# Altium PCB M8P.PcbDoc
Units mm, origin at the board's own origin, x right, y up, seen from the top; angles counter-clockwise.
Board outline 34.8 x 32 mm, 2 copper layers (Top Layer, Bottom Layer); 30 components, 25 nets, 123 pads, 15 vias.
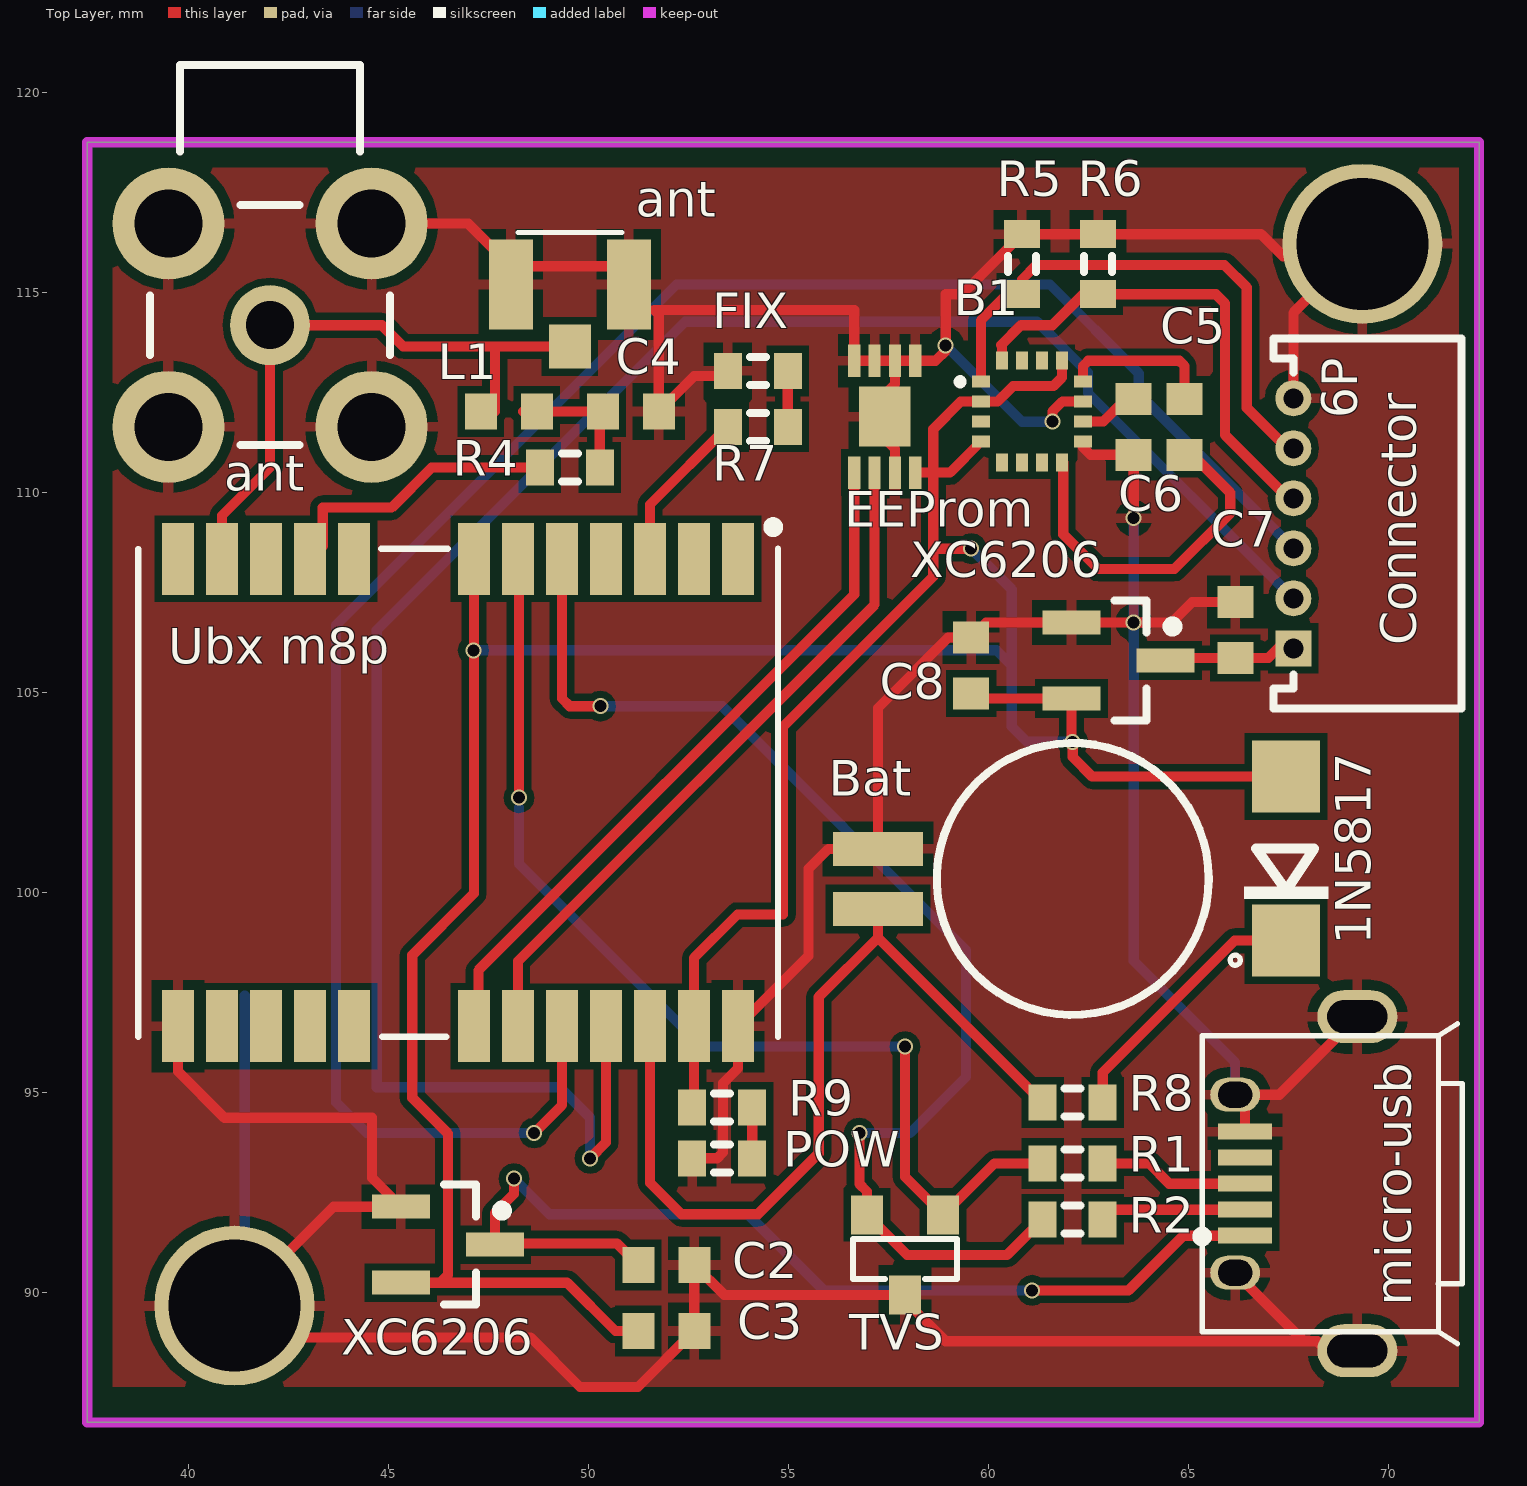
[diagram p0: Top Layer view]
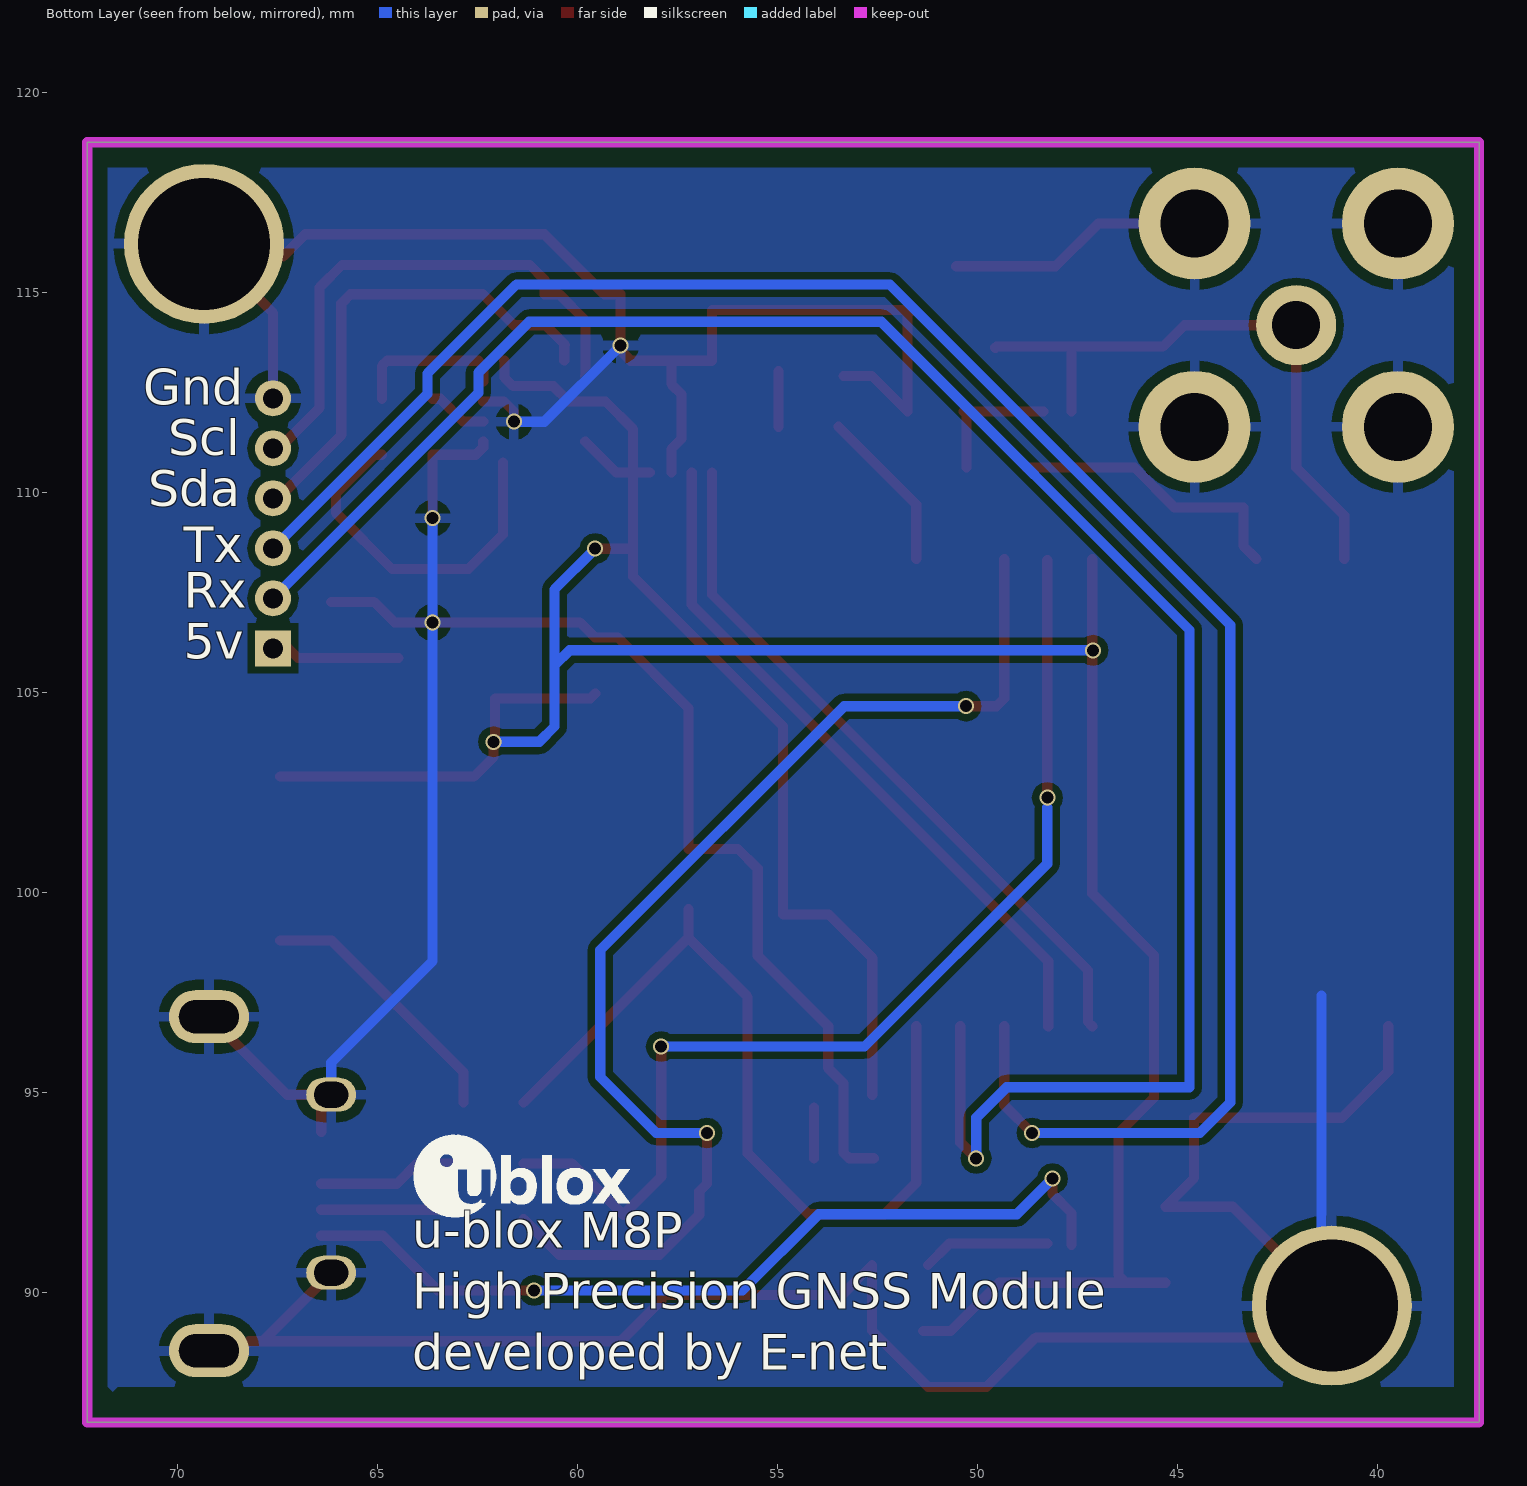
[diagram p1: Bottom Layer view, seen from below]

## Layer stack, top to bottom
Top Solder: solder mask 0.0102, Solder Resist, Dk 3.5
Top Layer: signal copper 0.0356
Dielectric 1: dielectric 0.32, FR-4, Dk 4.8
Bottom Layer: signal copper 0.0356
Bottom Solder: solder mask 0.0102, Solder Resist, Dk 3.5

## Board outline
37.465,86.741 37.465,118.745 72.263,118.745 72.263,86.741

## Design rules (kind name [scope] priority, off if disabled: settings)
Clearance [All] p1: gap=0.178
PolygonConnect [All] p1: connectstyle=Relief reliefconductorwidth=0.254 reliefentries=4 polygonreliefangle="90 Angle" airgapwidth=0.254
RoutingVias [All] p1: holewidth=0.711 width=1.27 viastyle="Through Hole" minholewidth=0.711 minwidth=1.27 maxholewidth=0.711 maxwidth=1.27
SolderMaskExpansion [All] p1: expansion=0.102
Width [All] p1: maxlimit=0.254 minlimit=0.254 preferedwidth=0.254
30 further rules are at their usual default settings.

## Components (designator, comment, footprint, x,y, rotation, side; value= is the part's Value field where it differs from the comment)
1N5817 "1N5817" DO214AC_SS12(Primary) 67.437,100.838 r90 top (schematic designator Diode)
ant "COAX-F" MCX5.08-H5 42.037,114.173 r270 top
ant "U.FL-R-SMT(01)" HRS_U.FL-R-SMT(01) 49.53,115.189 r0 top (schematic designator ant2)
B1 "HMC5883L-TR" 16-PIN-LPCC 61.087,112.014 r0 top
Bat "coin cell" BATTCON-6.8MM 62.103,100.33 r180 top (schematic designator BT?)
C2 "Cap Semi" 1608[0603] 51.943,90.678 r0 top
C3 "Cap Semi" 1608[0603] 51.943,89.027 r0 top
C4 "Cap Semi" 1608[0603] 51.054,112.014 r0 top
C5 "Cap Semi" 1608[0603] 64.897,111.633 r270 top
C6 "Cap Pol2" 1608[0603] 63.627,111.633 r270 top
C7 "Cap Semi" 1608[0603] 66.167,106.553 r90 top
C8 "Cap Semi" 1608[0603] 59.563,105.664 r90 top
Connector "653006117322" 653006117322 69.469,109.22 r90 top (schematic designator Connector1)
EEProm "24AA32AT-I/MC" DFN200X300X100-9N 57.404,111.887 r270 top (schematic designator EEPROM)
FIX "LED2" J1-0603 54.229,113.03 r180 top
L1 "Inductor" 1608[0603] 48.006,112.014 r0 top
micro-usb "WR-Communication Connectors 629105150921" 629105150921 67.691,92.71 r90 top
POW "LED2" J1-0603 53.34,93.345 r180 top
R1 "RES" J1-0603 62.103,93.218 r180 top
R2 "27R" J1-0603 62.103,91.821 r180 top
R4 "Res3" J1-0603 49.53,110.617 r180 top
R5 "Res3" J1-0603 60.833,115.697 r270 top
R6 "Res3" J1-0603 62.738,115.697 r90 top
R7 "Res3" J1-0603 54.229,111.633 r0 top
R8 "Res3" J1-0603 62.103,94.742 r0 top
R9 "Res3" J1-0603 53.34,94.615 r0 top
TVS "CDSOT23-SM712" SOT-23-3 57.912,90.932 r180 top (schematic designator "TVS DIODE")
"Ubx m8p" "NEO-M8" NEO 46.736,102.489 r90 top
XC6206 "AMS1117-3.3" SOT23_M 63.246,105.791 r0 top (schematic designator "XC6206  3.3")
XC6206 "AMS1117-3.3" SOT23_M 46.482,91.186 r0 top (schematic designator "XC6206  3.3-USB")

## Footprints (in the part's own frame and the unit in brackets; to place one, negate y for a bottom-side part, rotate by r counter-clockwise, add the part's x,y. Pads: shape width x height; smd on the part's side, far side on the other; paste and mask are expansions set on the pad)
16-PIN-LPCC [mm]
  rect 0.45x0.3 smd: 1(-1.275,0.75) 2(-1.275,0.25) 3(-1.275,-0.25) 4(-1.275,-0.75) 9(1.275,-0.75) 10(1.275,-0.25) 11(1.275,0.25) 12(1.275,0.75)
  rect 0.3x0.45 smd: 5(-0.75,-1.275) 6(-0.25,-1.275) 7(0.25,-1.275) 8(0.75,-1.275) 13(0.75,1.275) 14(0.25,1.275) 15(-0.25,1.275) 16(-0.75,1.275)
  silkscreen extent -1.83,0.71 -1.76,0.78
1608[0603] [mm] "Chip Capacitor, Body 1.6x0.8mm, IPC High Density"
  rect 0.8x0.9 smd: 1(-0.7,0) 2(0.7,0)
  body extent -0.87,-0.48 0.87,0.48, height 1.3
629105150921 [mm] "WR-COM_USB_Micro Type AB_Horizontal_SMT Micro Type AB Horizontal SMT - with Pegs - T&R Packaging"
  rect 0.4x1.35 smd: 1(-1.3,1.278) 2(-0.65,1.278) 3(0,1.278) 4(0.65,1.278) 5(1.3,1.278)
  oval 0.85x1.25 hole 0.65 slot 0.85 at 90 deg: Z1(-2.225,1.528) Z2(2.225,1.528)
  oval 1.325x2 hole 0.825 slot 1.5 at 90 deg: Z3(-4.175,-1.528) Z4(4.175,-1.528)
  silkscreen extent -4,-4.15 4,2.47, body extent -4.3,-4.15 4.3,1.72, height 2.73
653006117322 [mm] "1.25mm Male Horizontal Shrouded Header, 6p"
  rect 0.9x0.9 hole 0.5: 1(-3.125,1.85)
  round 0.9 hole 0.5: 2(-1.875,1.85) 3(-0.625,1.85) 4(0.625,1.85) 5(1.875,1.85) 6(3.125,1.85)
  silkscreen extent -4.62,-2.35 4.62,2.35, body extent -4.62,-2.35 4.62,2.35, height 3.55
BATTCON-6.8MM [mm]
  rect 2.25x0.85 smd: +(4.87,0.75) -(4.87,-0.75)
  silkscreen extent -3.4,-3.4 3.4,3.4
DFN200X300X100-9N [mil]
  rect 32x12 smd: 1(-55,30) 2(-55,10) 3(-55,-10) 4(-55,-30) 5(55,-30) 6(55,-10) 7(55,10) 8(55,30)
  rect 59x51 smd: 9(0,0)
DO214AC_SS12(Primary) [mm]
  rect 1.8x1.7 smd: A(2.05,0) C(-2.05,0)
  silkscreen extent -2.67,-1.05 0.25,1.4
HRS_U.FL-R-SMT(01) [mm]
  rect 1.1x2.25 smd: 1(-1.475,0) 2(1.475,0)
  rect 1.05x1.1 smd: 3(0,-1.55)
  silkscreen extent -1.3,1.3 1.3,1.3
J1-0603 [mm] "Chip Resistor, Body 1.6x0.8mm, IPC High Density"
  rect 0.7x0.9 smd: 1(-0.75,0) 2(0.75,0)
  silkscreen extent -0.2,-0.35 0.2,0.35, body extent -0.85,-0.48 0.85,0.48, height 0.9
MCX5.08-H5 [mm] "Connector; RF Coaxial, MCX, Thru-Hole; 5 Position; Right-Angle"
  round 2 hole 1.2: 1(0,0)
  round 2.8 hole 1.7: 2(-2.54,-2.54) 3(2.54,-2.54) 4(2.54,2.54) 5(-2.54,2.54)
  silkscreen extent -6.5,-3 3,3
NEO [mm] "u-blox NEO GNSS module"
  rect 1.8x0.8 smd paste-0.1: 1(5.842,-7) 2(5.842,-5.9) 3(5.842,-4.8) 4(5.842,-3.7) 5(5.842,-2.6) 6(5.842,-1.5) 7(5.842,-0.4) 8(5.842,2.6) 9(5.842,3.7) 10(5.842,4.8) 11(5.842,5.9) 12(5.842,7) 13(-5.842,7) 14(-5.842,5.9) 15(-5.842,4.8) 16(-5.842,3.7) 17(-5.842,2.6) 18(-5.842,-0.4) 19(-5.842,-1.5) 20(-5.842,-2.6) 21(-5.842,-3.7) 22(-5.842,-4.8) 23(-5.842,-5.9) 24(-5.842,-7)
  silkscreen extent -6.11,-8 6.69,8, body extent -6.1,-8 6.1,8, height 2.28
SOT23_M [mm] "SOT23, 3-Leads, Body 2.9x1.3mm, Pitch 0.95mm, Lead Span 2.3mm - Reverse Pinning, IPC Low Density"
  rect 1.45x0.6 smd: 1(1.175,0) 2(-1.175,-0.95) 3(-1.175,0.95)
  silkscreen extent -0.1,-1.5 1.48,1.5, body extent -0.7,-1.5 0.7,1.5, height 1.1
SOT-23-3 [mm]
  rect 0.802x0.972 smd: 1(-0.95,-1) 2(0.95,-1) 3(0,1)
  silkscreen extent -1.3,-0.4 1.3,0.6

## Part data
1N5817: library part SS12, "Diode, Schottk, Rectif, 1a, 20v, Sma"
ant: "RF Coaxial PCB Connector, MCX; Thru-Hole, Right-Angle Mount Socket, Blunt Post Terminal, 50 Ohm Impedance"
ant: "U.FL Series 6 Ghz 50 Ohm Ultra-small SMT Coaxial Cable Receptacle"
B1: "HONEYWELL - HMC5883L-TR - IC, DIGITAL COMPASS, 3 AXIS, 16 PIN"
Bat: library part BATTERY-6.8MM_SMD
C2 C3 C4 C5 C7 C8: "Capacitor (Semiconductor SIM Model)"
C6: "Polarized Capacitor (Axial)"
Connector: "WR-WTB 1.25mm Male Horizontal Shrouded Header, 6p"
EEProm: "24AA32A Series 32 K _4 K X 8_ 5.5 V Serial Surface Mount EEPROM - DFN-8"
FIX POW: "Typical RED, GREEN, YELLOW, AMBER GaAs LED"
micro-usb: "WR-COM_USB_Micro Type AB_Horizontal_SMT"
R1 R2: library part Res3, "Resistor"
R4 R5 R6 R7 R8 R9: "Resistor"
TVS: "Diode, Smt Tvs Array, 7vrwm & 12vrwm, Sot23 Package"
"Ubx m8p": library part NEO, "u-blox NEO GNSS module"
XC6206 XC6206: "3.3V  3-Terminal Adjustable Positive Voltage Regulator"

## Free pads (board coordinates)
  round 4 hole 3.3: 1(41.148,89.662) 1(69.342,116.205)

## Via types
v1: diameter 0.4, hole 0.3, Top Layer to Bottom Layer, 15 vias

## Nets (pads, with @x,y where several pads share a name; then routed paths per layer and width w, separated by ;. In a path a pad name is that pad's centre, name@x,y a point inside that pad or via, vN(x,y) a via of type N, cw(c..) or ccw(c..) an arc to the next point about the centre after c; other vN are vias at no path point)
3.3V: 1N5817.A "Ubx m8p.7" "Ubx m8p.23" B1.2 B1.4 B1.13 C3.1 C8.1 EEProm.8 R9.1 XC6206.2 | length 82.4
  Top Layer w0.254: XC6206.2@45.307,90.236 46.294,90.236 ; 47.136,108.331 47.136,99.968 45.593,98.425 45.593,94.857 46.482,93.968 46.482,90.424 46.294,90.236 ; C3.1@51.37,89.027 50.673,89.027 49.464,90.236 46.294,90.236 ; R9.1@52.636,94.927 52.636,96.647 52.636,98.356 53.721,99.441 54.864,99.441 54.864,104.14 58.615,107.891 58.615,108.585 ; EEProm.8@58.191,110.49 58.615,110.49 ; C8.1 59.686,104.841 62.071,104.841 v1@62.071,103.664 ; v1(59.563,108.585) 58.615,108.585 ; B1.4 59.038,110.49 58.615,110.49 ; B1.13 61.832,113.284 61.832,112.862 61.619,112.649 60.611,112.649 60.226,112.264 B1.2 59.305,112.264 58.615,111.574 58.615,110.49 ; v1(62.103,103.759) 62.103,103.378 62.593,102.888 1N5817.A ; 58.615,108.585 58.615,110.49
  Bottom Layer w0.254: v1(47.117,106.045) 60.198,106.045 60.579,105.664 ; v1(59.563,108.585) 60.579,107.569 60.579,105.664 ; v1(62.103,103.759) 60.96,103.759 60.579,104.14 60.579,105.664
5V: C7.1 Connector.1 XC6206.1@64.421,105.791 | length 3.8
  Top Layer w0.254: XC6206.1@64.483,105.853 C7.1 66.991,105.853 67.487,106.349 67.873,106.349 Connector.1@67.696,106.172
ANT: "Ubx m8p.11" ant.1@42.037,114.173 ant.3@49.53,113.639 L1.1 | length 15.7
  Top Layer w0.254: 40.836,108.331 40.836,109.416 42.037,110.617 42.037,114.173 44.831,114.173 45.365,113.639 49.53,113.639 ant.3@49.561,113.608 ; L1.1@47.656,112.014 47.656,113.608
BAT: "Ubx m8p.22" Bat.+ R8.1 | length 21.6
  Top Layer w0.254: 51.536,96.647 51.536,92.736 52.324,91.948 54.229,91.948 55.753,93.472 55.753,97.382 57.233,98.862 ; Bat.+ 57.233,98.862 ; R8.1 57.233,98.862
C1: B1.10 C6.1 | length 1.6
  Top Layer w0.254: B1.10 62.869,111.764 ; 62.776,111.764 62.869,111.764 ; C6.1 63.438,112.333 62.869,111.764
DM: micro-usb.2 R2.1 | length 3.3
  Top Layer w0.254: R2.1@63.092,92.06 micro-usb.2
DMR: "Ubx m8p.5" R2.2 TVS.2 | length 29.9
  Top Layer w0.254: 49.336,108.331 49.336,104.842 49.53,104.648 v1(50.292,104.648) ; v1(56.769,93.98) 56.769,92.71 56.962,92.517 TVS.2 57.962,90.932 60.464,90.932 R2.2
  Bottom Layer w0.254: v1(50.292,104.648) 53.34,104.648 59.436,98.552 59.436,95.377 58.039,93.98 v1(56.769,93.98)
DP: micro-usb.3 R1.1 | length 3.8
  Top Layer w0.254: R1.1 64.008,93.218 64.516,92.71 micro-usb.3
DPR: "Ubx m8p.6" R1.2 TVS.1 | length 26.5
  Top Layer w0.254: v1(48.26,102.362) 48.26,108.307 ; v1(57.912,96.139) 57.912,92.882 TVS.1 60.148,93.218 R1.2
  Bottom Layer w0.254: 48.26,102.108 48.26,100.711 52.832,96.139 v1(57.912,96.139)
GND: "Ubx m8p.13" "Ubx m8p.24" ant.1@48.055,115.189 ant.2 ant.3@39.497,111.633 ant.4 ant.5 B1.9 B1.11 Bat.- C2.2 C3.2 C4.2 C6.2 C7.2 C8.2 Connector.6 EEProm.1 EEProm.2 EEProm.3 EEProm.4 EEProm.7 EEProm.9 FIX.2 micro-usb.5 micro-usb.Z1 micro-usb.Z2 micro-usb.Z3 micro-usb.Z4 pad.1 POW.2 R5.1 R6.2 TVS.3 XC6206.3 | length 146.8
  Top Layer w0.254: 39.736,96.647 39.736,95.519 40.894,94.361 44.589,94.361 44.589,92.854 45.307,92.136 43.622,92.136 41.148,89.662 42.037,89.662 42.831,88.868 48.546,88.868 49.784,87.63 51.235,87.63 52.643,89.038 C2.2 53.389,89.932 TVS.3 57.912,89.789 58.928,88.773 67.876,88.773 ; ant.5 46.99,116.713 48.055,115.648 ant.2@50.546,115.648 ; POW.2 53.213,93.345 53.359,93.491 53.359,95.223 53.736,95.6 53.736,96.647 55.499,98.41 55.499,100.584 55.995,101.08 Bat.- 57.233,104.604 58.993,106.364 C8.2 59.94,106.741 62.071,106.741 64.577,106.741 65.089,107.253 C7.2 ; FIX.2@53.352,112.903 52.643,112.903 C4.2 51.754,114.44 51.64,114.554 56.642,114.554 EEProm.4 EEProm.3 EEProm.2 ; EEProm.7 57.658,111.08 57.404,111.334 EEProm.9 57.404,112.446 57.658,112.7 EEProm.2 ; v1(61.595,111.76) 61.595,112.014 61.845,112.264 B1.11 ; B1.9 62.362,111.12 62.549,110.933 C6.2 v1(63.627,109.347) ; micro-usb.Z1 67.876,88.773 ; micro-usb.Z2 67.268,94.935 micro-usb.Z4 ; micro-usb.5 micro-usb.Z2@66.413,94.685 ; Connector.6 67.619,114.482 69.033,115.896 67.365,115.896 66.814,116.447 R6.2 R5.1 59.333,114.947 58.928,114.947 v1(58.928,113.665) 58.928,113.538 58.674,113.284 EEProm.1 EEProm.2 ; micro-usb.Z3@68.453,88.535 68.215,88.773 67.876,88.773
  Bottom Layer w0.254: pad.1@41.402,89.586 41.402,97.409 ; v1(58.928,113.665) 60.833,111.76 v1(61.595,111.76) ; v1(63.627,109.347) 63.627,98.277 66.163,95.741 micro-usb.Z2
  other v1: 63.627,106.741
NetC4_1: C4.1 L1.2 R4.1 | length 3.3
  Top Layer w0.254: L1.2@48.356,112.014 C4.1 ; R4.1 C4.1@50.28,111.94
NetDiode_C: 1N5817.C R8.2 | length 6.7
  Top Layer w0.254: R8.2 62.853,95.492 66.149,98.788 1N5817.C
NetFIX_1: FIX.1 R7.2 | length 1.4
  Top Layer w0.254: R7.2 FIX.1
NetPOW_1: POW.1 R9.2 | length 1.3
  Top Layer w0.254: POW.1 R9.2
NetR7_1: "Ubx m8p.3" R7.1 | length 4.1
  Top Layer w0.254: 51.536,108.331 51.536,109.69 R7.1
RX: "Ubx m8p.21" Connector.2 | length 50.8
  Top Layer w0.254: v1(50.038,93.345) 50.436,93.743 50.436,96.647
  Bottom Layer w0.254: v1(50.038,93.345) 50.038,94.361 49.276,95.123 44.704,95.123 44.704,106.553 52.409,114.258 61.214,114.258 62.484,112.988 62.484,112.48 Connector.2
SCL: "Ubx m8p.19" EEProm.6 | length 17.5
  Top Layer w0.254: 48.236,96.647 48.236,98.274 57.15,107.188 EEProm.6
SCL2: B1.1 Connector.5 R5.2 | length 13.7
  Top Layer w0.254: B1.1@59.812,112.9 59.806,112.9 59.806,114.289 60.464,114.947 R5.2 60.833,115.316 61.195,115.678 65.894,115.678 66.453,115.119 66.453,112.109 67.34,111.222 Connector.5@67.746,111.222
SDA: "Ubx m8p.18" EEProm.5 | length 17.8
  Top Layer w0.254: 47.136,96.647 47.244,96.755 47.244,98.044 56.642,107.442 EEProm.5
SDA2: B1.16 Connector.4 R6.1 | length 12.3
  Top Layer w0.254: 60.314,113.68 60.807,114.173 61.595,114.173 62.369,114.947 R6.1 65.679,114.947 65.913,114.713 65.913,111.424 67.365,109.972 Connector.4@67.746,109.972 ; B1.16 60.337,113.657
SETC: B1.12 C5.1 | length 3.9
  Top Layer w0.254: B1.12 62.362,113.152 62.489,113.279 ; 62.484,113.284 64.77,113.284 64.897,113.157 C5.1
SETP: B1.8 C5.2 | length 8.9
  Top Layer w0.254: B1.8@61.868,110.739 61.868,108.947 62.738,108.077 64.643,108.077 66.04,109.474 66.04,109.982 65.089,110.933 C5.2
TX: "Ubx m8p.20" Connector.3 | length 50.6
  Top Layer w0.254: v1(48.641,93.98) 49.336,94.675 49.336,96.647
  Bottom Layer w0.254: v1(48.641,93.98) 44.45,93.98 43.688,94.742 43.688,106.68 52.197,115.189 61.533,115.189 63.754,112.968 63.754,112.46 Connector.3
VCC_RF: "Ubx m8p.9" R4.2 | length 7.3
  Top Layer w0.254: 43.036,108.331 43.355,108.65 43.355,109.612 45.075,109.612 46.08,110.617 R4.2
VCC_USB: C2.1 micro-usb.1 XC6206.1@47.657,91.186 | length 25.1
  Top Layer w0.254: XC6206.1@47.657,91.186 47.657,91.98 48.133,92.456 v1(48.133,92.837) ; XC6206.1@48.26,91.218 50.703,91.218 C2.1 ; v1(61.087,90.043) 63.5,90.043 64.867,91.41 micro-usb.1
  Bottom Layer w0.254: v1(48.133,92.837) 49.022,91.948 53.975,91.948 55.88,90.043 v1(61.087,90.043)
pads on no net: "Ubx m8p.1" "Ubx m8p.2" "Ubx m8p.4" "Ubx m8p.8" "Ubx m8p.10" "Ubx m8p.12" "Ubx m8p.14" "Ubx m8p.15" "Ubx m8p.16" "Ubx m8p.17" B1.3 B1.5 B1.6 B1.7 B1.14 B1.15 micro-usb.4

## Polygon pours and split planes (outlines as drawn)
GND on Top Layer "GND_L01_P008" (solid, pour order 8): 38.1,118.11 38.1,87.63 71.755,87.63 71.755,118.11 38.1,118.11
GND on Bottom Layer "GND_L02_P010" (solid, pour order 10): 38.1,118.11 38.1,87.63 71.501,87.63 71.628,87.503 71.755,87.63 71.755,118.11 38.1,118.11

## Keep-outs
Keep-Out Layer:
  lines w0.254: 37.465,86.741 37.465,118.745 43.72,118.745 65.119,118.745 72.263,118.745 72.263,86.741 37.465,86.741

## Silkscreen, mask and mechanical layers (free items; w line width, h text height)
Bottom Overlay:
  drawing of 1271 lines, arcs and shapes, not listed
  text "Gnd" at 70.866,111.887 h1.52
  text "Scl" at 70.231,110.617 h1.52
  text "Sda" at 70.739,109.347 h1.52
  text "Tx" at 69.85,107.95 h1.52
  text "Rx" at 69.85,106.807 h1.52
  text "5v" at 69.85,105.537 h1.52
  text "u-blox M8P / High Precision GNSS Module / developed by E-net" at 64.135,87.757 h1.52

## Text inside footprints (layer, text, board x,y; h text height)
Connector: Top Overlay "6P" at 69.219,111.845 h0.89 r90